# Altium PCB Light Sensor Node_STM32F030F4Px.PcbDoc
Units mm, origin at the board's own origin, x right, y up, seen from the top; angles counter-clockwise.
Board outline 44 x 72.6 mm, 2 copper layers (Top Layer, Bottom Layer); 89 components, 56 nets, 231 pads, 323 vias.
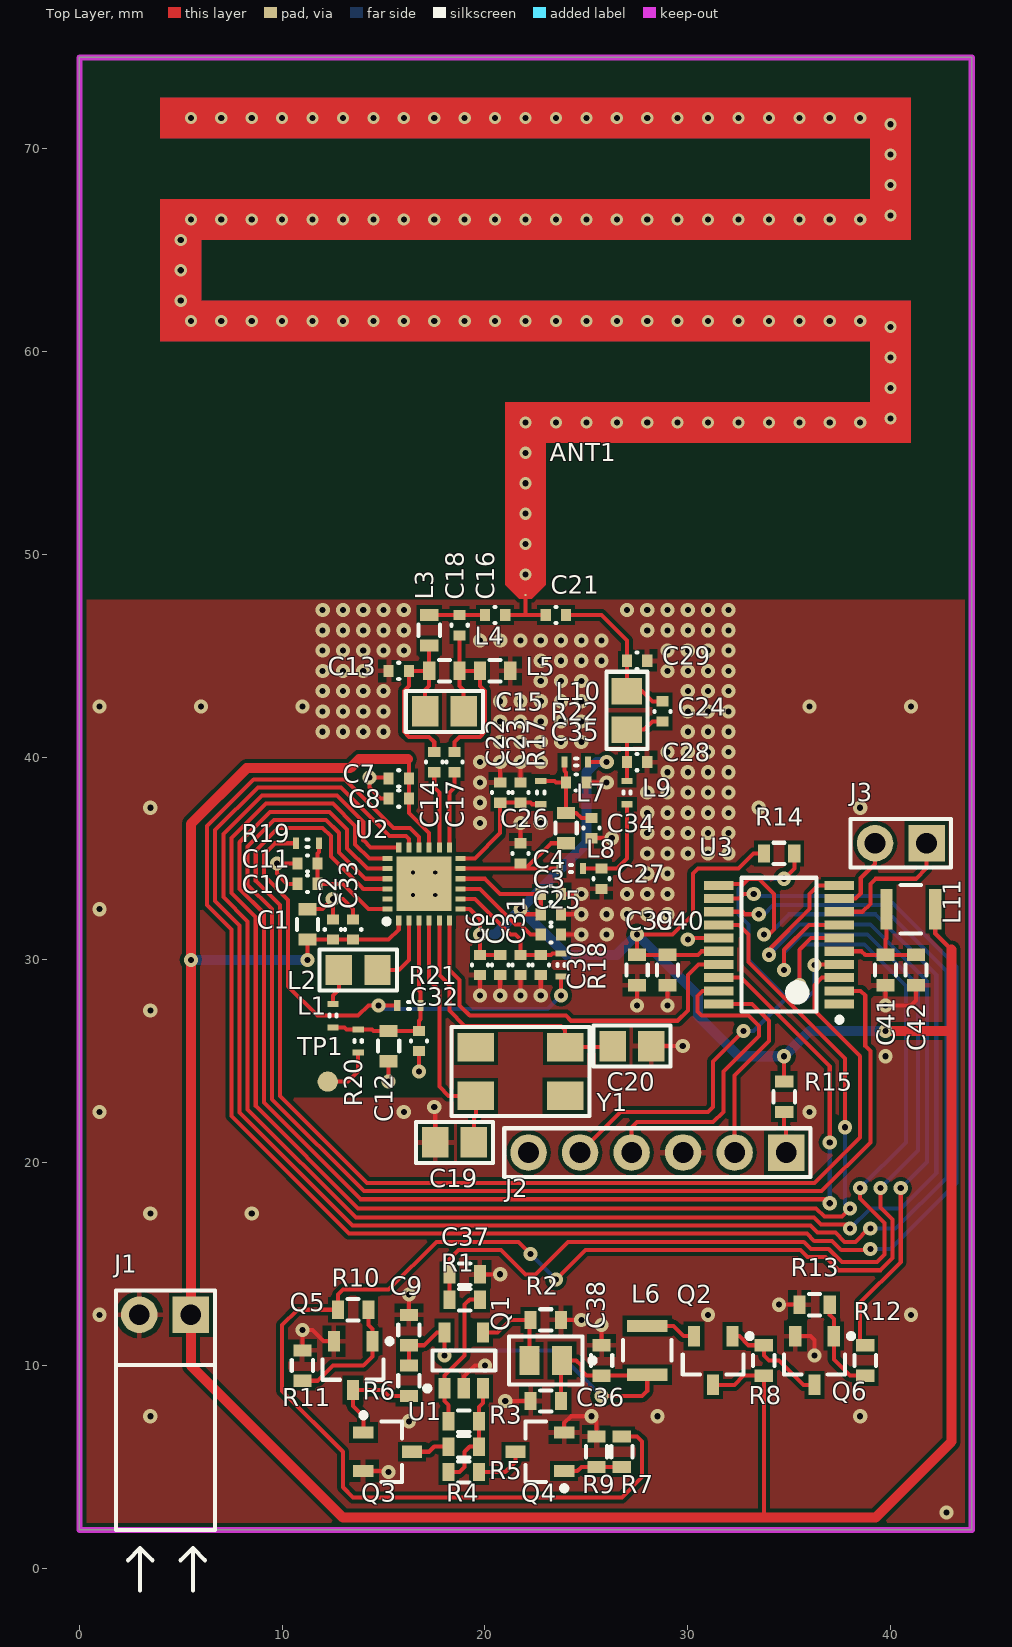
[diagram p0: Top Layer view]
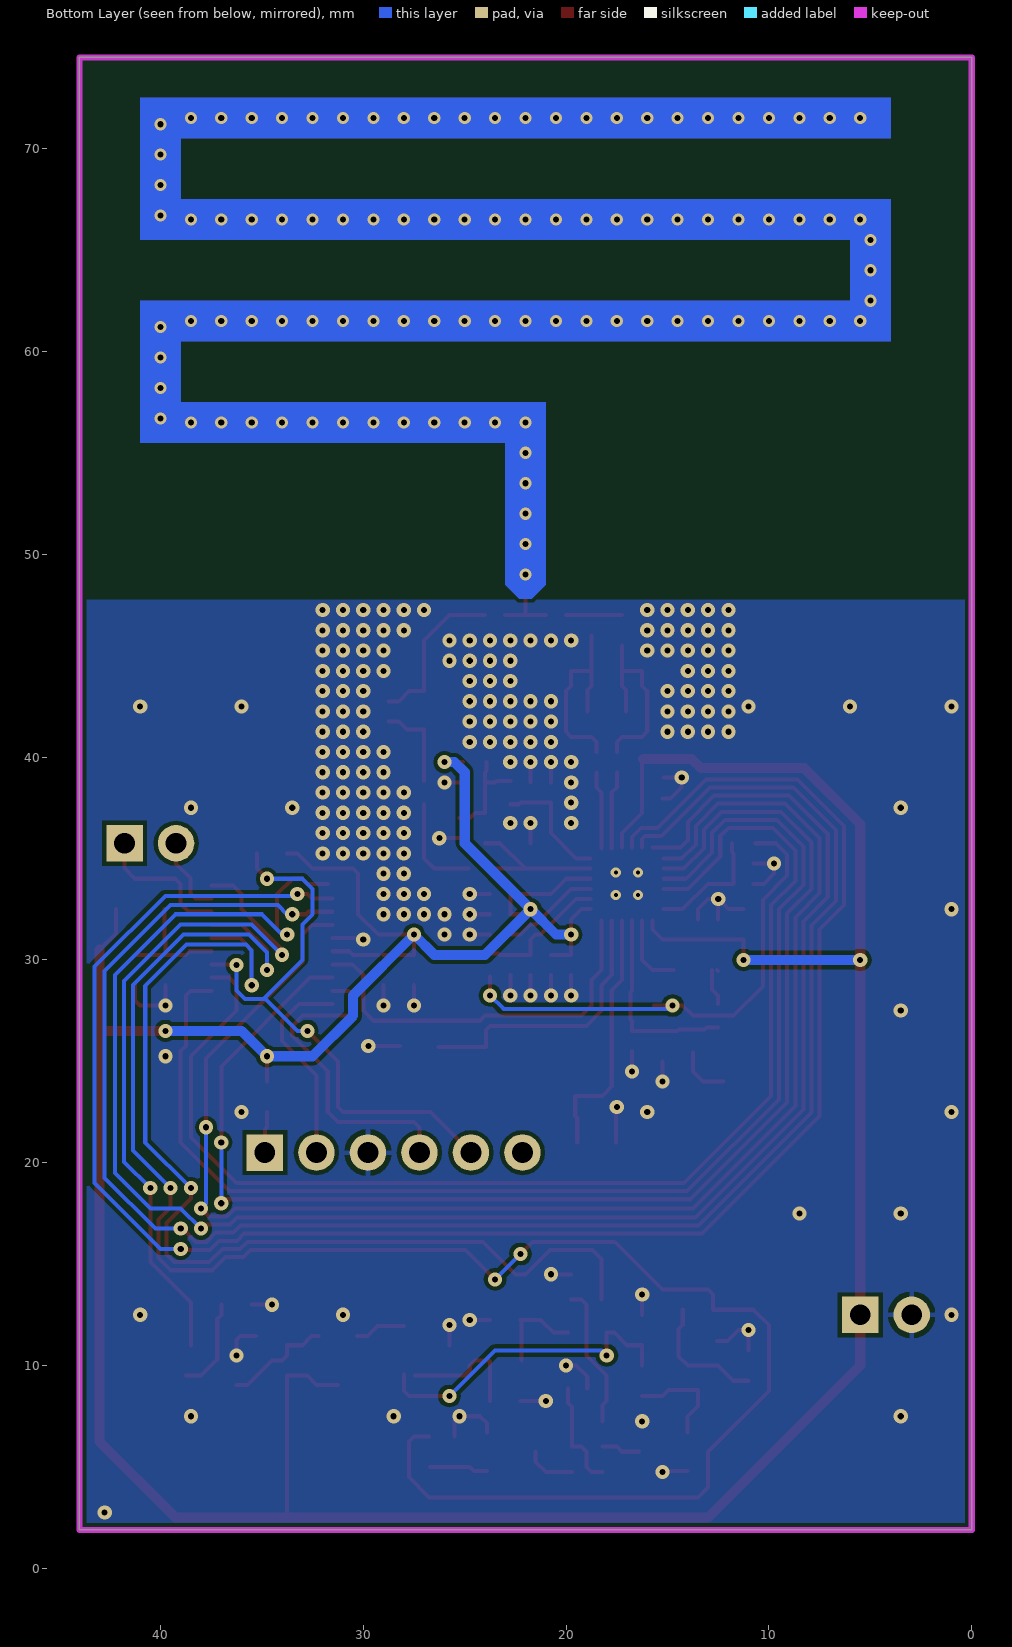
[diagram p1: Bottom Layer view, seen from below]
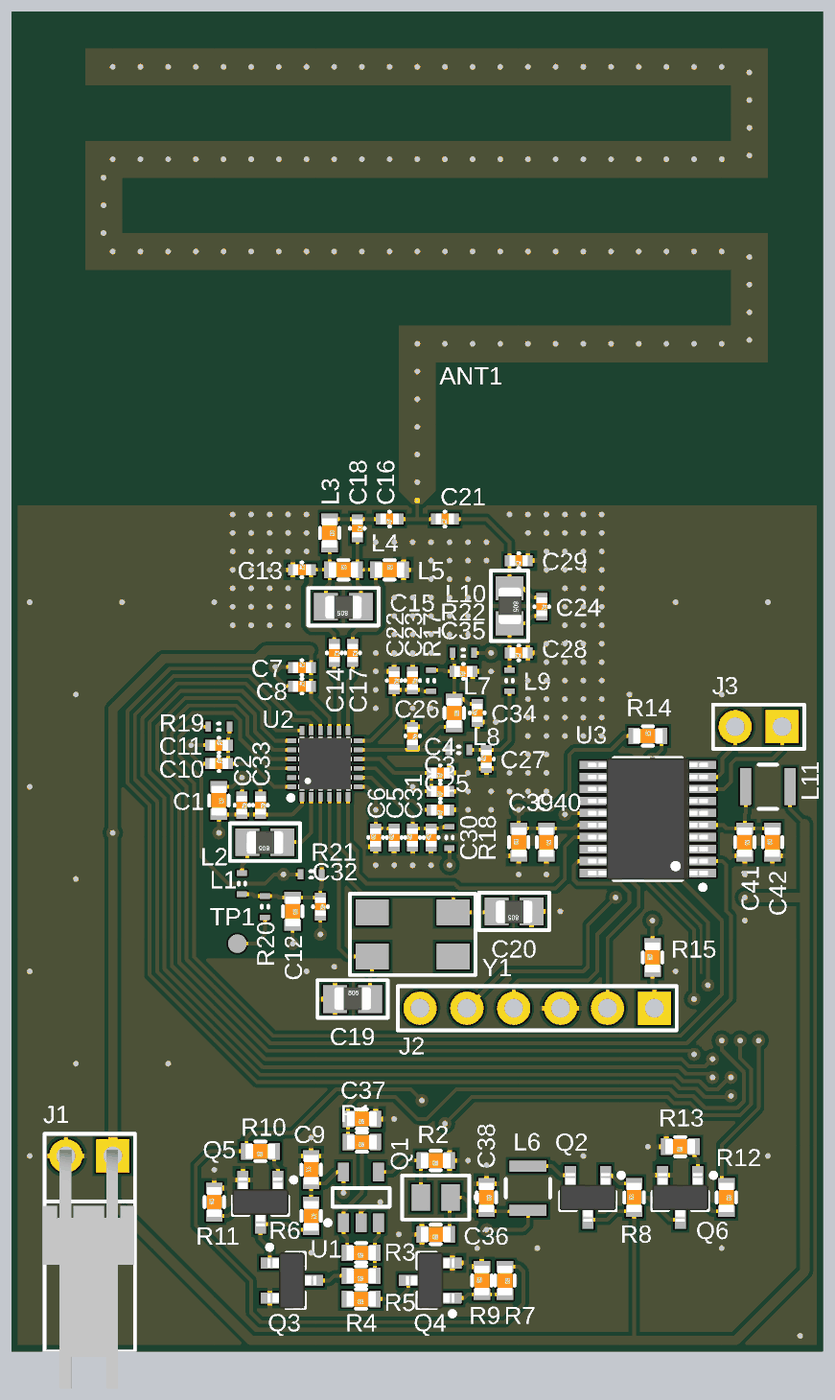
[diagram p2: 3D render of the assembled board from above, using the file's embedded part models]

## Layer stack, top to bottom
Top Solder: solder mask 0.0102, Solder Resist, Dk 3.5
Top Layer: signal copper 0.0356
Dielectric 1: dielectric 0.32, FR-4, Dk 4.8
Bottom Layer: signal copper 0.0356
Bottom Solder: solder mask 0.0102, Solder Resist, Dk 3.5

## Board outline
0,1.9 44,1.9 44,74.5 0,74.5

## Design rules (kind name [scope] priority, off if disabled: settings)
Clearance [All] p1: gap=0.2
ComponentClearance [All] p1 off: gap=0.254 collisioncheckmode=3 verticalgap=0.254 showdistances=FALSE
DiffPairsRouting [All] p1: maxlimit=0.254 minlimit=0.254 mostfreqgap=0.254 toplayer_minwidth=0.381 toplayer_maxwidth=0.381 toplayer_prefwidth=0.381 bottomlayer_minwidth=0.381 bottomlayer_maxwidth=0.381 bottomlayer_prefwidth=0.381 maxuncoupledlength=12.7
PolygonConnect PolygonConnect_Vias [IsVia AND InNet('GND')] p1: connectstyle=Direct reliefconductorwidth=0.254 reliefentries=4 polygonreliefangle="90 Angle" airgapwidth=0.254
PolygonConnect [All] p2: connectstyle=Relief reliefconductorwidth=0.254 reliefentries=4 polygonreliefangle="90 Angle" airgapwidth=0.254
RoomDefinition U_Radio [InComponentClass('U_Radio')] p1: confinementstyle=ConfineIn formatcopy=TRUE lockcomponents=FALSE outline 3.746,47.546 3.746,72.754 41.254,72.754 41.254,47.546 29.536,24.353 25.454,21.996 20.786,19.603 16.214,19.603 10.696,22.446
RoomDefinition U_Microcontroller [InComponentClass('U_Microcontroller')] p2: confinementstyle=ConfineIn formatcopy=TRUE lockcomponents=FALSE outline 20.646,18.996 20.646,22.004 26.671,30.929 30.296,34.579 33.071,36.079 37.726,37.254 43.274,37.254 43.274,34.246 43.104,30.896 42.079,28.071 36.354,18.996
RoomDefinition "U_Light Sensor" [InComponentClass('U_Light Sensor')] p3: confinementstyle=ConfineIn formatcopy=TRUE lockcomponents=FALSE outline 10.171,8.571 10.171,11.429 12.071,13.579 17.571,15.329 20.429,15.329 37.679,13.829 39.579,11.679 39.579,8.821 38.554,8.046 27.579,4.321 24.91,3.446 20.502,3.446 13.002,3.721
RoomDefinition "Light Sensor Node" [InComponentClass('Light Sensor Node')] p4: confinementstyle=ConfineIn formatcopy=TRUE lockcomponents=FALSE outline 1.482,-1.404 1.482,14.004 7.004,14.004 7.004,-1.404
RoutingVias [All] p1: holewidth=0.3 width=0.7 viastyle="Through Hole" minholewidth=0.3 minwidth=0.7 maxholewidth=0.3 maxwidth=0.7
SilkToSilkClearance [All] p1: silktosilkclearance=0.2
SolderMaskExpansion [All] p1: expansion=0.102
Width 50-Ohm [InNetClass('50R')] p1: maxlimit=0.254 minlimit=0.254 preferedwidth=0.254 impedancedriven=TRUE minimp=50.000000 maximp=50.000000 favimp=50.000000
Width [All] p2: maxlimit=1 minlimit=0.2 preferedwidth=0.2 minimp=50.000000 maximp=50.000000 favimp=50.000000
27 further rules are at their usual default settings.

## Classes and differential pairs
component class U_Radio: ANT1 C1 C2 C3 C4 C5 C6 C7 C8 C10 C11 C12 C13 C14 C15 C16 C17 C18 C19 C20 C21 C22 C23 C24 C25 C26 C27 C28 C29 C30 C31 C32 C33 C34 C35 L1 L2 L3 L4 L5 L7 L8 L9 L10 R17 R18 R19 R20 R21 R22 TP1 U2 X1 Y1
component class U_Microcontroller: C39 C40 C41 C42 J2 J3 L11 R14 R15 U3
component class "U_Light Sensor": C9 C36 C37 C38 L6 Q1 Q2 Q3 Q4 Q5 Q6 R1 R2 R3 R4 R5 R6 R7 R8 R9 R10 R11 R12 R13 U1
component class "Light Sensor Node": J1
net class 50R: NetANT1_1
differential pair S2LP_RX: +S2LP_RX_P -S2LP_RX_N

## Components (designator, comment, footprint, x,y, rotation, side; value= is the part's Value field where it differs from the comment)
ANT1 "868MHz" ANTENNA 22,48.5 r0 top
C1 "4.7uF" C0603 11.25,31.75 r270 top
C2 "150nF" C0402 12.5,31.5 r270 top
C3 "470nF" C0402 23.25,32.25 r180 top
C4 "100pF" C0402 23.25,33.25 r180 top
C5 "470nF" C0402 20.75,29.75 r90 top
C6 "100pF" C0402 19.75,29.75 r90 top
C7 "470nF" C0402 15.75,38.95 r0 top
C8 "100pF" C0402 15.75,37.95 r0 top
C9 "1nF" C0603 16.25,11.75 r90 top
C10 "470nF" C0402 11.25,33.75 r0 top
C11 "100pF" C0402 11.25,34.75 r0 top
C12 "1uF" C0603 15.25,25.75 r270 top
C13 "1.5pF" C0402 15.75,44.25 r0 top
C14 "100pF" C0402 17.5,39.75 r270 top
C15 "DNA" R0805 18,42.25 r180 top
C16 "100pF" C0402 20.5,47 r180 top
C17 "100pF" C0402 18.5,39.75 r270 top
C18 "1.5pF" C0402 18.75,46.5 r270 top
C19 "7pF" R0805 18.5,21 r0 top
C20 "7pF" R0805 27.25,25.75 r180 top
C21 "100pF" C0402 23.5,47 r180 top
C22 "150nF" C0402 20.75,38.25 r270 top
C23 "100pF" C0402 21.75,38.25 r270 top
C24 "1.2pF" C0402 28.75,42.25 r270 top
C25 "470pF" C0402 23.25,31.25 r180 top
C26 "DNA" C0402 21.75,35.25 r270 top
C27 "3.9pF" C0402 25.75,34 r90 top
C28 "5.6pF" C0402 27.5,39.75 r180 top
C29 "2.7pF" C0402 27.5,44.75 r180 top
C30 "100pF" C0402 22.75,29.75 r90 top
C31 "100pF" C0402 21.75,29.75 r90 top
C32 "150nF" C0402 16.75,26 r270 top
C33 "100pF" C0402 13.5,31.5 r270 top
C34 "150nF" C0402 25.25,36.5 r90 top
C35 "100pF" C0402 24.5,38.75 r180 top
C36 "1nF" C0603 23,8.25 r180 top
C37 "100n" C0603 19,14.5 r180 top
C38 "Value" C0603 25.75,10.25 r270 top
C39 "Value" C0603 27.5,29.5 r90 top
C40 "1nF" C0603 29,29.5 r270 top
C41 "1nF" C0603 39.75,29.5 r270 top
C42 "100n" C0603 41.25,29.5 r90 top
J1 "22-05-3021" MOLEX_22-05-3021 5.5,12.5 r180 top
J2 "#NAME?" HEADER_6WAY 28.5,20.5 r180 top
J3 "#NAME?" HEADER_2WAY 40.5,35.75 r180 top
L1 "0R" R0402 12.5,27.25 r270 top
L2 "IND" R0805 13.75,29.5 r180 top
L3 "IND" R0603 17.25,46.25 r270 top
L4 "IND" R0603 18,44.25 r0 top
L5 "IND" R0603 20.5,44.25 r0 top
L6 "IND" TAIYOYUDEN_CB2518T102K 28,10.75 r90 top
L7 "IND" R0603 24,36.5 r270 top
L8 "IND" R0402 24.25,34.5 r180 top
L9 "IND" R0402 27,38.25 r270 top
L10 "IND" R0805 27,42.3 r270 top
L11 "IND" TAIYOYUDEN_CB2518T102K 41,32.5 r0 top
Q1 "TEMT6200FX01" VISHAY_TEMT6200FX01 23,10.25 r180 top
Q2 "2N7002ET1G" ON_2N7002E 31.25,10.25 r270 top
Q3 "2N7002ET1G" ON_2N7002E 15.206,5.75 r0 top
Q4 "2N7002ET1G" ON_2N7002E 22.706,5.75 r180 top
Q5 "2N7002ET1G" ON_2N7002E 13.5,10 r270 top
Q6 "2N7002ET1G" ON_2N7002E 36.25,10.25 r270 top
R1 "100R" R0603 19,13.25 r180 top
R2 "100R" R0603 23,12.25 r180 top
R3 "100k" R0603 18.956,7.25 r180 top
R4 "100k" R0603 18.956,4.75 r180 top
R5 "1k" R0603 18.956,6 r180 top
R6 "100k" R0603 16.25,9.25 r270 top
R7 "100R" R0603 26.75,5.75 r270 top
R8 "100k" R0603 33.75,10.25 r90 top
R9 "100k" R0603 25.5,5.75 r90 top
R10 "100R" R0603 13.5,12.75 r180 top
R11 "100k" R0603 11,10 r90 top
R12 "100R" R0603 38.75,10.25 r270 top
R13 "100k" R0603 36.25,13 r180 top
R14 "100k" R0603 34.5,35.25 r0 top
R15 "0R" R0603 34.75,23.25 r90 top
R17 "DNA" R0402 22.75,38.25 r90 top
R18 "DNA" R0402 23.75,29.75 r90 top
R19 "DNA" R0402 11.25,35.75 r180 top
R20 "DNA" R0402 13.75,26 r90 top
R21 "0R" R0402 16.25,27.75 r0 top
R22 "DNA" R0402 24.5,39.75 r0 top
TP1 "TP_1mm" TP_1mm 12.25,24 r0 top
U1 "TLV333IDBVR" TI_TLV333IDBVR 18.956,10.25 r90 top
U2 "#NAME?" ST_S2-LP 17,33.75 r90 top
U3 "ST_STM32F030F4P6" ST_STM32F030F4P6 34.5,30.75 r180 top
Y1 "50MHz" ABRACON_ABMM2 21.75,24.5 r0 top

## Footprints (in the part's own frame and the unit in brackets; to place one, negate y for a bottom-side part, rotate by r counter-clockwise, add the part's x,y. Pads: shape width x height; smd on the part's side, far side on the other; paste and mask are expansions set on the pad)
ABRACON_ABMM2 [mm]
  rect 1.8x1.4 smd: 1(-2.2,-1.2) 2(2.2,-1.2) 3(2.2,1.2) 4(-2.2,1.2)
  silkscreen extent -3.4,-2.2 3.4,2.2
ANTENNA [mm]
  rect 0.1x0.1 smd: 1(0,-0.5)
  Top Layer region: -1,0 -1,0 -0.3,-0.7 0.3,-0.7 0.3,-0.7 1,0
  Top Layer region: -18,24 19,24 19,22 -18,22
  Top Layer region: 17,22 19,22 19,19 17,19
  Top Layer region: -18,19 19,19 19,17 -18,17
  Top Layer region: -18,17 -16,17 -16,14 -18,14
  Top Layer region: -18,14 19,14 19,12 -18,12
  Top Layer region: 17,12 19,12 19,9 17,9
  Top Layer region: 1,9 19,9 19,7 1,7
  Top Layer region: -1,9 1,9 1,0 -1,0
  Bottom Layer region: -1,0 -1,0 -0.3,-0.7 0.3,-0.7 0.3,-0.7 1,0
  Bottom Layer region: -1,9 1,9 1,0 -1,0
  Bottom Layer region: 1,9 19,9 19,7 1,7
  Bottom Layer region: 17,12 19,12 19,9 17,9
  Bottom Layer region: -18,14 19,14 19,12 -18,12
  Bottom Layer region: -18,17 -16,17 -16,14 -18,14
  Bottom Layer region: -18,19 19,19 19,17 -18,17
  Bottom Layer region: 17,22 19,22 19,19 17,19
  Bottom Layer region: -18,24 19,24 19,22 -18,22
C0402 [mm] "Chip Resistor; Body 1.1 x 0.5 mm (LxW typ)"
  rect 0.5x0.6 smd: 1(-0.5,0) 2(0.5,0)
  silkscreen extent -0.03,-0.4 0.03,0.4, body extent -0.5,-0.3 0.5,0.3, height 0.2
C0603 [mm] "Chip Capacitor; Body 1.6 x 0.8 mm (LxW typ)"
  rect 0.6x0.9 smd: 1(-0.75,0) 2(0.75,0)
  silkscreen extent -0.28,-0.53 0.28,0.53, body extent -0.8,-0.4 0.8,0.4, height 0.3
HEADER_2WAY [mm] "Wire-To-Board Connector, KK 7478 Series, Through Hole, Header, Right angle, 2 contacts, 2.54 mm"
  rect 1.8x1.8 hole 1.02: 1(-1.27,0)
  round 1.8 hole 1.02: 2(1.27,0)
  silkscreen extent -2.47,-1.2 2.47,1.2
HEADER_6WAY [mm] "Wire-To-Board Connector, KK 7478 Series, Through Hole, Header, Right angle, 2 contacts, 2.54 mm"
  rect 1.8x1.8 hole 1.02: 1(-6.35,0)
  round 1.8 hole 1.02: 2(-3.81,0) 3(-1.27,0) 4(1.27,0) 5(3.81,0) 6(6.35,0)
  silkscreen extent -7.55,-1.2 7.55,1.2
MOLEX_22-05-3021 [mm] "Wire-To-Board Connector, KK 7478 Series, Through Hole, Header, Right angle, 2 contacts, 2.54 mm"
  rect 1.8x1.8 hole 1.02: 1(0,0)
  round 1.8 hole 1.02: 2(2.54,0)
  silkscreen extent -1.2,-1.2 3.7,13.6, body extent -1.16,-0.34 3.76,12.59, height 6.38
ON_2N7002E [mm]
  rect 1x0.6 smd: 1(-1.2,0.95) 2(-1.2,-0.95) 3(1.2,0)
  silkscreen extent -1.32,-1.5 0.7,1.93, body extent -1.32,-1.52 1.32,1.52, height 1.11
R0402 [mm] "Chip Resistor, 2-Leads, Body 1.00x0.50mm, IPC Medium Density"
  rect 0.3x0.55 smd: 1(-0.575,0) 2(0.575,0)
  silkscreen extent -0.05,-0.17 0.05,0.18, body extent -0.53,-0.27 0.53,0.28, height 0.4
R0603 [mm] "Chip Resistor; Body 1.6 x 0.8 mm (LxW typ)"
  rect 0.6x0.9 smd: 1(-0.75,0) 2(0.75,0)
  silkscreen extent -0.28,-0.53 0.28,0.53, body extent -0.8,-0.4 0.8,0.4, height 0.3
R0805 [mm] "Chip Resistor; Body 2.0 x 1.3 mm (LxW typ)"
  rect 1.3x1.5 smd: 1(-0.95,0) 2(0.95,0)
  silkscreen extent -1.91,-1.02 1.91,1.02, body extent -1,-0.6 1,0.65, height 0.78
ST_S2-LP [mm] "QFN, 24-Leads, Body 2.70x2.70mm, Pitch 0.50mm, Thermal Pad 2.70x2.70mm, IPC Medium Density"
  rect 0.5x0.25 smd: 1(-1.8,1.25) 2(-1.8,0.75) 3(-1.8,0.25) 4(-1.8,-0.25) 5(-1.8,-0.75) 6(-1.8,-1.25) 13(1.8,-1.25) 14(1.8,-0.75) 15(1.8,-0.25) 16(1.8,0.25) 17(1.8,0.75) 18(1.8,1.25)
  rect 0.25x0.5 smd: 7(-1.25,-1.8) 8(-0.75,-1.8) 9(-0.25,-1.8) 10(0.25,-1.8) 11(0.75,-1.8) 12(1.25,-1.8) 19(1.25,1.8) 20(0.75,1.8) 21(0.25,1.8) 22(-0.25,1.8) 23(-0.75,1.8) 24(-1.25,1.8)
  rect 2.7x2.7 smd: 25(0,0)
  silkscreen extent -1.97,1.73 -1.73,1.97, body extent -1.45,-1.45 1.45,1.45, height 1
ST_STM32F030F4P6 [mm]
  rect 1.45x0.45 smd: 1(-2.975,2.925) 2(-2.975,2.275) 3(-2.975,1.625) 4(-2.975,0.975) 5(-2.975,0.325) 6(-2.975,-0.325) 7(-2.975,-0.975) 8(-2.975,-1.625) 9(-2.975,-2.275) 10(-2.975,-2.925) 11(2.975,-2.925) 12(2.975,-2.275) 13(2.975,-1.625) 14(2.975,-0.975) 15(2.975,-0.325) 16(2.975,0.325) 17(2.975,0.975) 18(2.975,1.625) 19(2.975,2.275) 20(2.975,2.925)
  silkscreen extent -3.1,-3.3 1.85,3.82, body extent -3.25,-3.3 3.25,3.3, height 1.2
TAIYOYUDEN_CB2518T102K [mm] "Add component description"
  rect 0.6x2 smd: 1(-1.2,0) 2(1.2,0)
  silkscreen extent -0.5,-1.2 0.5,1.2
TI_TLV333IDBVR [mm]
  rect 1x0.6 smd: 1(-1.375,0.95) 2(-1.375,0) 3(-1.375,-0.95) 4(1.375,-0.95) 5(1.375,0.95)
  silkscreen extent -1.5,-1.55 0.5,1.92, body extent -0.88,-1.52 0.87,1.53, height 1.45
TP_1mm [mm] "Test point land 1.0mm"
  round 1 smd: 1(0,0)
VISHAY_TEMT6200FX01 [mm] "Add component description"
  rect 1x1.45 smd: 1(-0.8,0) 2(0.8,0)
  silkscreen extent -2.43,-1.19 1.82,1.19

## Part data
ANT1: library part ANTENNA
C1 C2 C3 C4 C5 C6 C7 C8 C9 C10 C11 C12 C13 C14 C15 C16 C17 C18 C19 C20 C21 C22 C23 C24 C25 C26 C27 C28 C29 C30 C31 C32 C33 C34 C35 C36 C37 C38 C39 C40 C41 C42: library part CAP, "CAP"
J1 J3: library part 2WAY
J2: library part 6WAY
L1: library part IND
Q1: library part VISHAY_TEMT6200FX01
Q2 Q3 Q4 Q5 Q6: library part "N-channel MOSFET"
R1 R2 R3 R4 R5 R6 R7 R8 R9 R10 R11 R12 R13 R14 R15 R17 R18 R19 R20 R21 R22: library part RES, "RES"
U1: library part OPAMP
U2: library part ST_S2-LP
Y1: library part OSC, "Crystal Oscillator"

## Via types
v1: diameter 0.7, hole 0.3, Top Layer to Bottom Layer, tented both sides, 222 vias
v2: diameter 0.6, hole 0.3, Top Layer to Bottom Layer, tented both sides, 97 vias
v3: diameter 0.5, hole 0.2, Top Layer to Bottom Layer, tented both sides, 4 vias

## Nets (pads, with @x,y where several pads share a name; then routed paths per layer and width w, separated by ;. In a path a pad name is that pad's centre, name@x,y a point inside that pad or via, vN(x,y) a via of type N, cw(c..) or ccw(c..) an arc to the next point about the centre after c; other vN are vias at no path point)
ADC_LIGHT: C37.2 R1.2 U3.6 | length 51.9
  Top Layer w0.2: R1.2 C37.2 18.25,15.25 18.7,15.7 20.8,15.7 22,14.5 22.5,14.5 24.1,16.1 35.718,16.1 36.068,15.75 36.949,15.75 37.599,15.1 39.334,15.1 39.7,15.466 39.7,17.034 38.5,18.234 v1(38.5,18.75) ; v1(35.5,28.75) 35.5,30.5 36.075,31.075 U3.6
  Bottom Layer w0.2: v1(35.5,28.75) 35.5,30.466 35.784,30.75 38.716,30.75 40.75,28.716 40.75,21 v1(38.5,18.75)
GND: C1.1 C2.1 C3.1 C4.1 C5.1 C6.1 C7.1 C8.1 C9.2 C10.1 C11.1 C12.2 C13.1 C19.1 C20.1 C22.1 C23.1 C25.1 C26.1 C27.1 C28.1 C29.1 C30.1 C31.1 C32.2 C33.1 C34.1 C35.1 C36.2 C37.1 C38.1 C39.1 C40.2 C41.2 C42.1 J1.2 J2.3 L5.2 Q3.2 Q4.2 Q5.2 Q6.2 R2.1 R9.2 R11.2 R13.2 U1.2 U2.25 U3.15 | length 50.3
  Top Layer w0.2: C10.1 10.25,33.75 9.75,34.25 v1(9.75,34.75) C11.1 ; R11.2 v1(11,11.75) 11.5,11.75 12.05,11.2 Q5.2 ; C1.1 12,32.5 v1(12.5,33) ; C2.1 v1(12.5,33) ; C33.1 13.5,32.5 13,33 v1(12.5,33) ; Q3.2 v1@15.2,4.8 ; C7.1@15.2,39 v1(14.3,39) 14.3,38.5 14.85,37.95 C8.1 ; v1(15.25,24) C12.2 ; C9.2 v1(16.25,13.5) ; v1(16.75,24.5) C32.2 ; v1(17.5,22.75) 17.55,22.7 C19.1 ; U1.2 18.956,9.456 19.5,10 v1(20,10) ; C37.1 v1(20.75,14.5) ; v1(19.75,28.25) C6.1 ; v1(20.75,28.25) C5.1 ; C22.1 v1(20.75,39.75) ; v1(21,8.25) C36.2 ; v1(21.75,28.25) C31.1 ; C26.1 v1(21.75,36.75) ; C23.1 v1(21.75,39.75) ; v1(22.75,28.25) C30.1 ; R2.1 v1@24.5,12.25 ; C25.1 v1(24.75,31.25) ; C3.1 v1(24.75,32.25) ; C4.1 v1(24.75,33.25) ; Q4.2 23.906,7.156 24.25,7.5 v1(25.25,7.5) 25.5,7.25 R9.2 ; C35.1 v1(26,38.75) ; C34.1 v1(26.25,36) ; C38.1 v1(25.75,12) ; v1(27.5,27.75) C39.1 ; C20.1 v1(29.75,25.75) ; v1(29,27.75) C40.2 ; v1(30,31) 30.075,31.075 U3.15 ; v1(34.5,13) R13.2 ; Q6.2 36.05,11.45 36.25,11.25 v1(36.25,10.5) ; C41.2 v1(39.75,27.75) 41,27.75 41.25,28 C42.1
  other v1: 42.75,2.75 15.25,4.75 16.25,7.25 3.5,7.5 28.5,7.5 38.5,7.5 24.75,12.25 1,12.5 31,12.5 41,12.5 3.5,17.5 8.5,17.5 1,22.5 16,22.5 36,22.5 39.75,25.25 3.5,27.5 26,31.25 26,32.25 27,32.25 28,32.25 29,32.25 1,32.5 27,33.25 28,33.25 29,33.25 28,34.25 29,34.25 28,35.25 29,35.25 30,35.25 31,35.25 32,35.25 28,36.25 29,36.25 30,36.25 31,36.25 32,36.25 19.75,36.75 22.75,36.75 28,37.25 29,37.25 30,37.25 31,37.25 32,37.25 3.5,37.5 33.5,37.5 38.5,37.5 19.75,37.75 28,38.25 29,38.25 30,38.25 31,38.25 32,38.25 19.75,38.75 29,39.25 30,39.25 31,39.25 32,39.25 19.75,39.75 22.75,39.75 29,40.25 30,40.25 31,40.25 32,40.25 20.75,40.75 21.75,40.75 22.75,40.75 23.75,40.75 24.75,40.75 12,41.25 13,41.25 14,41.25 15,41.25 30,41.25 31,41.25 32,41.25 20.75,41.75 21.75,41.75 22.75,41.75 23.75,41.75 24.75,41.75 12,42.25 13,42.25 14,42.25 15,42.25 30,42.25 31,42.25 32,42.25 1,42.5 6,42.5 11,42.5 36,42.5 41,42.5 20.75,42.75 21.75,42.75 22.75,42.75 23.75,42.75 24.75,42.75 12,43.25 13,43.25 14,43.25 15,43.25 30,43.25 31,43.25 32,43.25 22.75,43.75 23.75,43.75 24.75,43.75 12,44.25 13,44.25 14,44.25 29,44.25 30,44.25 31,44.25 32,44.25 22.75,44.75 23.75,44.75 24.75,44.75 25.75,44.75 12,45.25 13,45.25 14,45.25 15,45.25 16,45.25 29,45.25 30,45.25 31,45.25 32,45.25 19.75,45.75 20.75,45.75 21.75,45.75 22.75,45.75 23.75,45.75 24.75,45.75 25.75,45.75 12,46.25 13,46.25 14,46.25 15,46.25 16,46.25 28,46.25 29,46.25 30,46.25 31,46.25 32,46.25 12,47.25 13,47.25 14,47.25 15,47.25 16,47.25 27,47.25 28,47.25 29,47.25 30,47.25 31,47.25 32,47.25
  other v3: 16.45,33.2 17.55,33.2 16.45,34.3 17.55,34.3
GPIO0: U2.20 U3.18 | length 67
  Top Layer w0.2: U2.20 14.2,34.5 13.2,35.5 13.2,36.434 12.334,37.3 9.4,37.3 7.9,35.8 7.9,33.5 9.1,32.3 9.1,22.963 13.863,18.2 36.8,18.2 v1(37,18) ; U3.18 32.625,29.125 37,24.75 v1(37,21)
  Bottom Layer w0.2: v1(37,18) v1(37,21)
GPIO1: U2.21 U3.2 | length 63.3
  Top Layer w0.2: U2.21 14.1,34 12.8,35.3 12.8,36.269 12.169,36.9 9.6,36.9 8.3,35.6 8.3,33.7 9.5,32.5 9.5,23.128 14.028,18.6 36.6,18.6 39,21 39,25.5 38.75,25.75 38.75,28.25 38.525,28.475 U3.2
GPIO2: U2.22 U3.3 | length 62.5
  Top Layer w0.2: U2.22 14,33.5 12.4,35.1 12.4,36.1 12,36.5 9.8,36.5 8.7,35.4 8.7,33.9 9.9,32.7 9.9,23.294 14.194,19 36.25,19 38.5,21.25 38.5,25.25 36.25,27.5 36.25,28.75 36.625,29.125 U3.3
GPIO3: U2.23
nCS: U2.19 U3.14 | length 72.7
  Top Layer w0.2: U2.19 14.3,35 13.6,35.7 13.6,36.6 12.5,37.7 9.2,37.7 7.5,36 7.5,33.3 8.7,32.1 8.7,22.797 13.747,17.75 36.331,17.75 36.731,17.35 37.6,17.35 v1(38,17.75) ; U3.14 32.525,31.725 33,31.25 33,29.892 37.75,25.142 v1(37.75,21.75)
  Bottom Layer w0.2: v1(37.75,21.75) 37.75,18 v1(38,17.75)
NetANT1_1: ANT1.1 C16.1 C21.2 | length 3.5
  Top Layer w0.2: C16.1 22,47 ; 22,48.5 ANT1.1 22,47 ; C21.2 22,47
  other v2: 22,49 22,50.5 22,52 22,53.5 22,55 22,56.5 23.5,56.5 25,56.5 26.5,56.5 28,56.5 29.5,56.5 31,56.5 32.5,56.5 34,56.5 35.5,56.5 37,56.5 38.5,56.5 40,56.7 40,58.2 40,59.7 40,61.2 5.5,61.5 7,61.5 8.5,61.5 10,61.5 11.5,61.5 13,61.5 14.5,61.5 16,61.5 17.5,61.5 19,61.5 20.5,61.5 22,61.5 23.5,61.5 25,61.5 26.5,61.5 28,61.5 29.5,61.5 31,61.5 32.5,61.5 34,61.5 35.5,61.5 37,61.5 38.5,61.5 5,62.5 5,64 5,65.5 5.5,66.5 7,66.5 8.5,66.5 10,66.5 11.5,66.5 13,66.5 14.5,66.5 16,66.5 17.5,66.5 19,66.5 20.5,66.5 22,66.5 23.5,66.5 25,66.5 26.5,66.5 28,66.5 29.5,66.5 31,66.5 32.5,66.5 34,66.5 35.5,66.5 37,66.5 38.5,66.5 40,66.7 40,68.2 40,69.7 40,71.2 5.5,71.5 7,71.5 8.5,71.5 10,71.5 11.5,71.5 13,71.5 14.5,71.5 16,71.5 17.5,71.5 19,71.5 20.5,71.5 22,71.5 23.5,71.5 25,71.5 26.5,71.5 28,71.5 29.5,71.5 31,71.5 32.5,71.5 34,71.5 35.5,71.5 37,71.5 38.5,71.5
NetC10_2: C10.2 C11.2 R19.1 U2.24 | length 6
  Top Layer w0.2: R19.1 11.825,35.325 11.75,35.25 C11.2 C10.2 13,33.75 14.25,32.5 14.75,32.5 U2.24
NetC12_1: C12.1 C32.1 L1.2 R20.2 R21.2 U2.3 | length 9.8
  Top Layer w0.2: L1.2 13.075,26.675 13.175,26.575 R20.2 14.425,26.575 14.5,26.5 C12.1 C32.1 16.75,27 16.825,27.075 R21.2 16.825,28.425 16.75,28.5 16.75,31.5 U2.3
NetC13_2: C13.2 C14.1 C15.2 L3.2 L4.1 | length 9.6
  Top Layer w0.2: C15.2 17.05,43.3 17.25,43.5 L4.1 ; L3.2 L4.1 ; C14.1 17.5,40.75 17.25,41 16.25,41 16,41.25 16,43.25 16.25,43.5 C13.2 L4.1
NetC15_1: C15.1 C17.1 C18.2 L4.2 L5.1 | length 10.1
  Top Layer w0.2: C17.1 18.5,40.75 18.75,41 19.75,41 20,41.25 20,43.25 19.75,43.5 L5.1 L4.2 ; C18.2 L4.2 ; C15.1 18.95,43.3 18.75,43.5 L4.2
NetC16_2: C16.2 C18.1 L3.1 | length 2.7
  Top Layer w0.2: L3.1 C18.1 C16.2
NetC19_2: C19.2 U2.4 Y1.1 | length 12.7
  Top Layer w0.2: U2.4 17.25,31.5 17.25,29 17.75,28.5 17.75,23.75 18.2,23.3 Y1.1 19.55,22.3 19.45,22.2 C19.2
NetC20_2: C20.2 U2.5 Y1.3 | length 14
  Top Layer w0.2: U2.5 17.75,31.5 17.75,29.25 18.25,28.75 18.25,27.5 19,26.75 23.75,26.75 23.95,26.55 Y1.3 C20.2@26.3,25.7
NetC21_1: C21.1 C24.1 C29.2 L10.1 | length 8
  Top Layer w0.2: C21.1 25.75,47 27,45.75 C29.2 L10.1 27.75,43.25 28.25,42.75 C24.1
NetC22_2: C22.2 C23.2 R17.1 U2.12 | length 6
  Top Layer w0.2: U2.12 19.25,35 19.5,35 20.75,36.25 C22.2 C23.2 22.25,37.75 22.325,37.675 R17.1
NetC24_2: C24.2 C28.2 L9.1 L10.2 | length 4.4
  Top Layer w0.2: L9.1 C28.2 L10.2 27.85,41.35 28.25,41.75 C24.2
NetC25_2: C25.2 U2.9 | length 4.9
  Top Layer w0.2: U2.9 19.25,33.5 19.75,33.5 21.5,31.75 21.75,31.75 22.25,31.25 C25.2
NetC26_2: C26.2 L7.2 L8.2 U2.11 | length 7.4
  Top Layer w0.2: U2.11 19.25,34.5 21.75,34.5 C26.2@22,34.5 ; L8.2 C26.2@22,34.5 ; L7.2 23.25,35.75 C26.2@22,34.5
NetC27_2: C27.2 L8.1 L9.2 | length 5.1
  Top Layer w0.2: L8.1 C27.2 26.5,34.5 27,35 L9.2
NetC34_2: C34.2 C35.2 L7.1 R17.2 R22.1 | length 5.2
  Top Layer w0.2: R17.2 23.425,38.825 23.5,38.75 C35.2 ; R22.1 23.925,39.325 24,39.25 C35.2 ; C34.2 24.75,37 24.5,37.25 L7.1 C35.2
NetC41_1: C41.1 C42.2 L11.1 U3.5 | length 6.1
  Top Layer w0.2: U3.5 38.575,30.425 38.75,30.25 C41.1 ; L11.1 39.8,31.05 39.75,31 C41.1 ; C42.2 C41.1
NetJ2_1: J2.1 R15.1 | length 2
  Top Layer w0.2: R15.1 34.75,21.75 34.85,21.65 J2.1
NetL1_1: L1.1 L2.2 | length 1.9
  Top Layer w0.2: L1.1 12.5,28.25 12.8,28.55 L2.2 ; L2.2@12.5,29.45 L2.2@12.55,29.5
NetL2_1: L2.1 U2.2 | length 3.7
  Top Layer w0.2: L2.1 15.75,29.5 16.25,30 16.25,31.5 U2.2
NetL6_2: L6.2 Q2.2 | length 2.5
  Top Layer w0.2: L6.2 29.3,11.95 29.8,11.45 Q2.2
NetQ1_2: Q1.2 R2.2 U1.4 | length 4.6
  Top Layer w0.2: U1.4 20.625,11.625 21.25,12.25 R2.2 ; Q1.2 R2.2@22.2,12.2
NetQ2_1: Q2.1 Q6.3 R8.2 | length 5.3
  Top Layer w0.2: Q2.1 32.55,11.45 33,11 R8.2 33.75,10.5 34,10.25 34.5,10.25 35.7,9.05 Q6.3
NetQ3_1: Q3.1 Q5.3 R6.2 | length 5.2
  Top Layer w0.2: Q3.1 14.006,7.494 13.5,8 Q5.3 14.95,8.8 15.25,8.5 R6.2
NetQ3_3: Q3.3 R5.2 | length 1.9
  Top Layer w0.2: Q3.3 17.25,5.75 17.5,6 R5.2
NetQ4_1: Q4.1 R7.2 R9.1 | length 2.9
  Top Layer w0.2: Q4.1 24.55,4.8 24.75,5 25.456,5 R7.2@26.706,5
NetQ4_3: Q4.3 R4.1 | length 2.5
  Top Layer w0.2: R4.1 21,4.75 21.506,5.256 Q4.3
NetQ5_1: Q5.1 R10.1 R11.1 | length 6.3
  Top Layer w0.2: R11.1 11.75,9.25 12.5,10 14,10 14.45,10.45 Q5.1 14.45,11.8 14.25,12 R10.1
NetQ6_1: Q6.1 R12.2 R13.1 | length 4.7
  Top Layer w0.2: R13.1 37,12.5 37.2,12.3 Q6.1 37.2,10.3 38,9.5 R12.2
NetR1_1: R1.1 R3.2 U1.1 | length 7.1
  Top Layer w0.2: R3.2 18.206,8.044 18.006,8.244 U1.1 18.006,9.506 19,10.5 19,13 19.25,13.25 R1.1
NetR3_1: R3.1 R4.2 R5.1 U1.3 | length 5.4
  Top Layer w0.2: R4.2 18.75,4.75 19,5 19,5.75 19.25,6 R5.1 R3.1 19.706,7.956 19.906,8.156 U1.3
NetR20_1: R20.1 TP1.1 | length 2.6
  Top Layer w0.2: TP1.1 13.25,24 13.75,24.5 R20.1
nRESET: J2.5 R14.2 U3.4 | length 29
  Top Layer w0.2: J2.5 26.69,22.5 31,22.5 31.25,22.75 31.25,25 v1(32.75,26.5) ; v1(34.75,34) 35.25,34.5 R14.2 ; v1@36.275,29.775 U3.4
  Bottom Layer w0.2: v1(32.75,26.5) 33.25,26.5 34.875,28.125 ; v1(34.75,34) 33,34 32.5,33.5 32.5,32.25 33,31.75 33,30 34.927,28.073 35.823,28.073 36.25,28.5 v1(36.25,29.75)
RANGE: R7.1 R10.2 U3.7 | length 89.3
  Top Layer w0.2: v1(22.25,15.5) 21.65,16.1 17.6,16.1 15.25,13.75 13,13.75 12.75,13.5 R10.2 10.75,12.75 10,12 10,8.75 13,5.75 13,4 13.5,3.5 26.75,3.5 27.75,4.5 27.75,6.25 27.5,6.5 R7.1 ; v1(23.5,14.25) 24.95,15.7 35.552,15.7 35.902,15.35 36.784,15.35 37.434,14.7 39.5,14.7 40.1,15.3 40.1,17.2 39.5,17.8 v1(39.5,18.75) ; v1(34.75,29.5) 34.75,30.5 35.975,31.725 U3.7
  Bottom Layer w0.2: v1(22.25,15.5) v1(23.5,14.25) ; v1(34.75,29.5) 34.75,30.358 35.642,31.25 38.858,31.25 41.342,28.766 41.342,20.592 v1(39.5,18.75)
S2LP_RX_N: C17.2 U2.13 | length 3.9
  Top Layer w0.2: U2.13@18.25,35.5 U2.13 18.25,36 18.25,38.25 18.5,38.5 C17.2
S2LP_RX_P: C14.2 U2.14 | length 3.9
  Top Layer w0.2: C14.2 17.5,38.5 17.75,38.25 17.75,36 U2.14 U2.14@17.75,35.5
SCLK: U2.18 U3.11 | length 87.8
  Top Layer w0.2: U2.18 14.35,35.55 14,35.9 14,36.8 12.7,38.1 9,38.1 7.1,36.2 7.1,33.1 8.3,31.9 8.3,22.631 13.631,17.3 36.215,17.3 36.565,16.95 37.8,16.95 v1(38,16.75) ; U3.11@31.75,33.75 32.75,33.75 33,34 33.5,34 34.25,33.25 34.25,31.5 34,31.25 v1(33.75,31.25)
  Bottom Layer w0.2: v1(33.75,31.25) 34,31.25 35,32.25 39.25,32.25 42.25,29.25 42.25,19.5 40.5,17.75 39,17.75 v1(38,16.75)
SDI: U2.17 U3.13 | length 88.5
  Top Layer w0.2: U2.17 16.25,35.95 16.1,36.1 15.3,36.1 12.9,38.5 8.8,38.5 6.7,36.4 6.7,32.9 7.9,31.7 7.9,22.466 13.466,16.9 36.049,16.9 36.399,16.55 37.281,16.55 37.731,16.1 38.269,16.1 38.919,16.75 v1(39,16.75) v1@38.85,16.9 ; U3.13 32.705,32.375 32.83,32.25 v1(33.5,32.25) v1@33.331,32.25
  Bottom Layer w0.2: v1(33.5,32.25) 33.75,32.25 34.204,32.704 39.503,32.704 42.75,29.457 42.75,19.25 40.25,16.75 v1(39,16.75)
SDN: U2.6 U3.17 | length 19.7
  Top Layer w0.2: U2.6 18.25,31.5 18.25,29.5 18.75,29 18.75,27.75 19.25,27.25 24,27.25 24.25,27 29.5,27 30,27.5 30,29.25 30.525,29.775 U3.17
SDO: U2.16 U3.12 | length 91.7
  Top Layer w0.2: U2.16 16.75,36.05 16.3,36.5 15.5,36.5 13.1,38.9 8.6,38.9 6.3,36.6 6.3,32.7 7.5,31.5 7.5,22.3 13.3,16.5 35.884,16.5 36.234,16.15 37.115,16.15 37.565,15.7 v1@39,15.7 ; U3.12 32.525,33.025 32.75,33.25 v1(33.25,33.25)
  Bottom Layer w0.2: v1(33.25,33.25) 33.342,33.158 39.756,33.158 43.25,29.664 43.25,19 40,15.75 v1(39,15.75)
SENSE_EN: R12.1 U3.10 | length 34.4
  Top Layer w0.2: v1(34,30.25) 34,30.5 36,32.5 36,33.25 36.425,33.675 U3.10 ; R12.1@38.5,11 38.5,13.1 40.5,15.1 v1(40.5,18.75)
  Bottom Layer w0.2: v1(34,30.25) 35.5,31.75 39,31.75 41.796,28.954 41.796,20.046 v1(40.5,18.75)
SWDCLK: J2.2 U3.20 | length 10
  Top Layer w0.2: U3.20 33.175,27.825 34,27 34,26 32.31,24.31 J2.2
SWDIO: J2.4 U3.19 | length 16.3
  Top Layer w0.2: J2.4 27.23,21.73 27.5,22 31.25,22 31.75,22.5 31.75,24.5 33.5,26.25 33.5,26.75 33,27.25 30.688,27.25 30.473,27.465 30.473,28.223 30.725,28.475 U3.19
SWO: J2.6
USART1_RX: J3.2 U3.9 | length 3.9
  Top Layer w0.2: U3.9 38.275,33.025 38.527,33.277 38.527,34.027 39.23,34.73 J3.2
USART1_TX: J3.1 U3.8 | length 7
  Top Layer w0.2: U3.8 38.625,32.375 39,32.75 39,33.75 39.25,34 41.25,34 41.77,34.52 J3.1
VCC: C1.2 C2.2 C3.2 C4.2 C5.2 C6.2 C7.2 C8.2 C33.2 C39.2 C40.1 J1.1 L11.2 Q2.3 R8.1 R14.1 R15.2 R22.2 U2.1 U2.7 U2.10 U2.15 U3.16 | length 198.1
  Top Layer w0.2: v1(11.25,30) C1.2 C2.2 C33.2 15.25,31 15.75,31.5 U2.1 ; 16.25,39.85 C7.2 C8.2 16.25,37.25 17.25,36.25 U2.15 ; U2.7 19.25,32.5 19.75,32 C6.2 C5.2 ; U2.10 20,34 20.75,33.25 C4.2 C3.2 22,32.25 v1(21.75,32.5) ; R22.2 v1(26,39.75) ; C40.1 27.75,30.25 C39.2 v1(27.5,31.25) 29.25,31.25 30.25,32.25 30.25,34.25 30.5,34.5 32.5,34.5 33.25,35.25 R14.1 ; C40.1@29.25,30.25 30.5,30.25 30.675,30.425 U3.16 ; Q2.3 32.3,9.05 32.75,9.5 R8.1 33.75,2.55 ; R15.2 v1(34.75,25.25) ; L11.2 42.2,31.3 43,30.5
  Top Layer w0.5: 16.2,39.9 13.8,39.9 13.353,39.453 8.253,39.453 5.5,36.7 v1(5.5,30) 5.5,10 13,2.5 39.25,2.5 43,6.25 43,26.5 ; v1(39.75,26.5) 43,26.5 ; 43,30.5 43,26.5
  Bottom Layer w0.5: v1(5.5,30) v1(11.25,30) ; v1(19.75,31.25) 20.5,31.25 v1(21.75,32.5) ; v1(26,39.75) 25.5,39.75 25,39.25 25,35.75 v1(21.75,32.5) ; v1(39.75,26.5) 36,26.5 v1(34.75,25.25) 32.5,25.25 30.5,27.25 30.5,28.25 v1(27.5,31.25) 26.5,30.25 24,30.25 v1(21.75,32.5)
VRSYNTH: C30.2 C31.2 R18.2 U2.8 | length 6.6
  Top Layer w0.2: U2.8 19.25,33 19.5,33 21.25,31.25 21.5,31.25 21.75,31 C31.2 C30.2 23.25,30.25 23.325,30.325 R18.2
VSENSE: C9.1 C36.1 C38.2 L6.1 Q1.1 R6.1 U1.5 | length 22.1
  Top Layer w0.2: R6.1 C9.1 17,11 17.625,11.625 U1.5 v1@18.006,10.506 ; C36.1 Q1.1@23.75,10.2 ; Q1.1 24.5,10.25 24.75,10 24.75,9.75 25,9.5 C38.2 L6.1@27.45,9.5 ; v1(25.75,8.5) 27.75,8.5 28,8.75 L6.1
  Bottom Layer w0.2: v1(18,10.5) 18.25,10.75 23.5,10.75 v1(25.75,8.5)
VSMPS2: R18.1 R19.2 R21.1 | length 25.3
  Top Layer w0.2: R19.2 9.65,35.75 9.1,35.2 9.1,34.15 10.3,32.95 10.3,28.7 11.75,27.25 13.75,27.25 14.25,27.75 v1(14.75,27.75) R21.1 ; v1(23.75,28.25) R18.1
  Bottom Layer w0.2: v1(14.75,27.75) 14.927,27.573 23.073,27.573 v1(23.75,28.25)
pads on no net: U3.1 Y1.2 Y1.4

## Polygon pours and split planes (outlines as drawn)
GND on Top Layer "GND-TopLayer" (solid, pour order 0): 0,47.75 44,47.75 44,1.9 0,1.9
GND on Bottom Layer "GND-BottomLayer" (solid, pour order 4): 0,47.75 44,47.75 44,1.9 0,1.9

## Keep-outs
Keep-Out Layer:
  the board outline again, w0.3

## Other copper
Top Layer:
  pour cut-out: 10.1,30.5 17.9,30.5 17.9,23.2 10.1,23.2

## Silkscreen, mask and mechanical layers (free items; w line width, h text height)
Mechanical 1:
  the board outline again, w0.1